# Altium PCB STVC_PCB.PcbDoc
Units mil, origin at the board's own origin, x right, y up, seen from the top; angles counter-clockwise.
Board outline 1400 x 2000 mil, 2 copper layers (Top Layer, Bottom Layer); 8 components, 7 nets, 110 pads, 0 vias.
Unrouted connection lines stored in the file: 14.
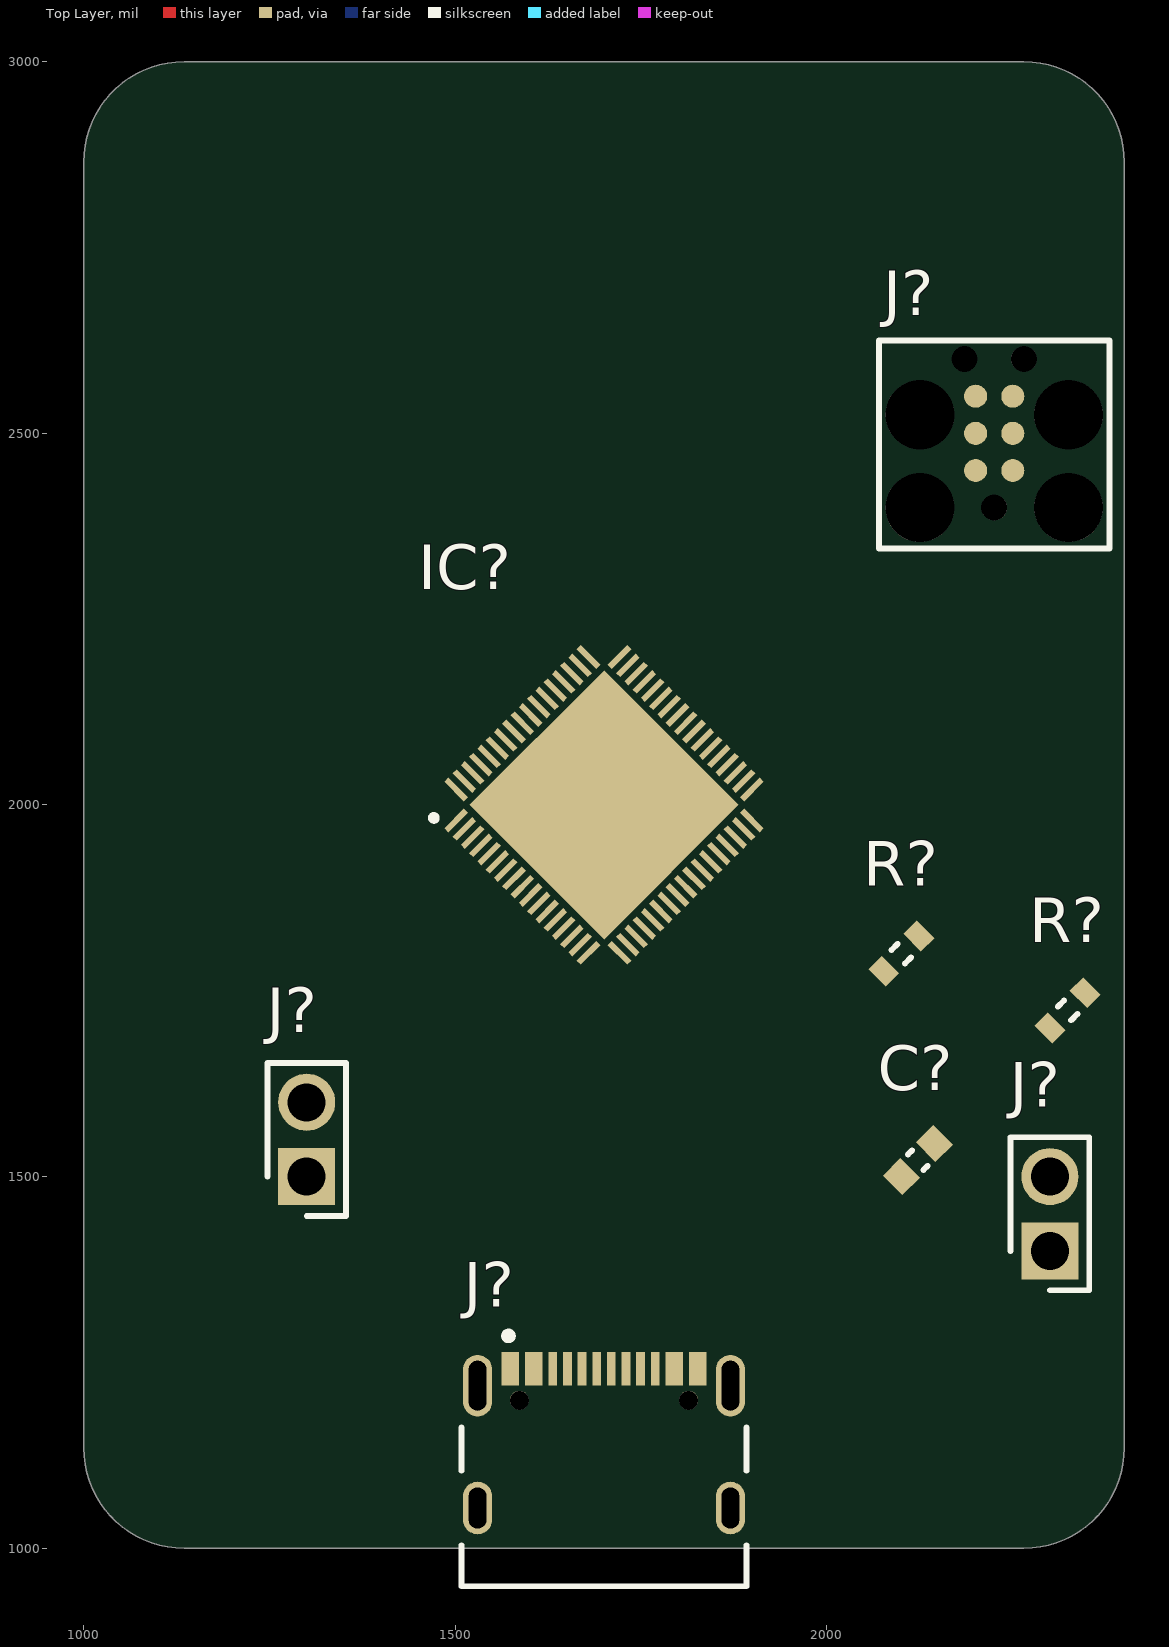
[diagram p0: Top Layer view]
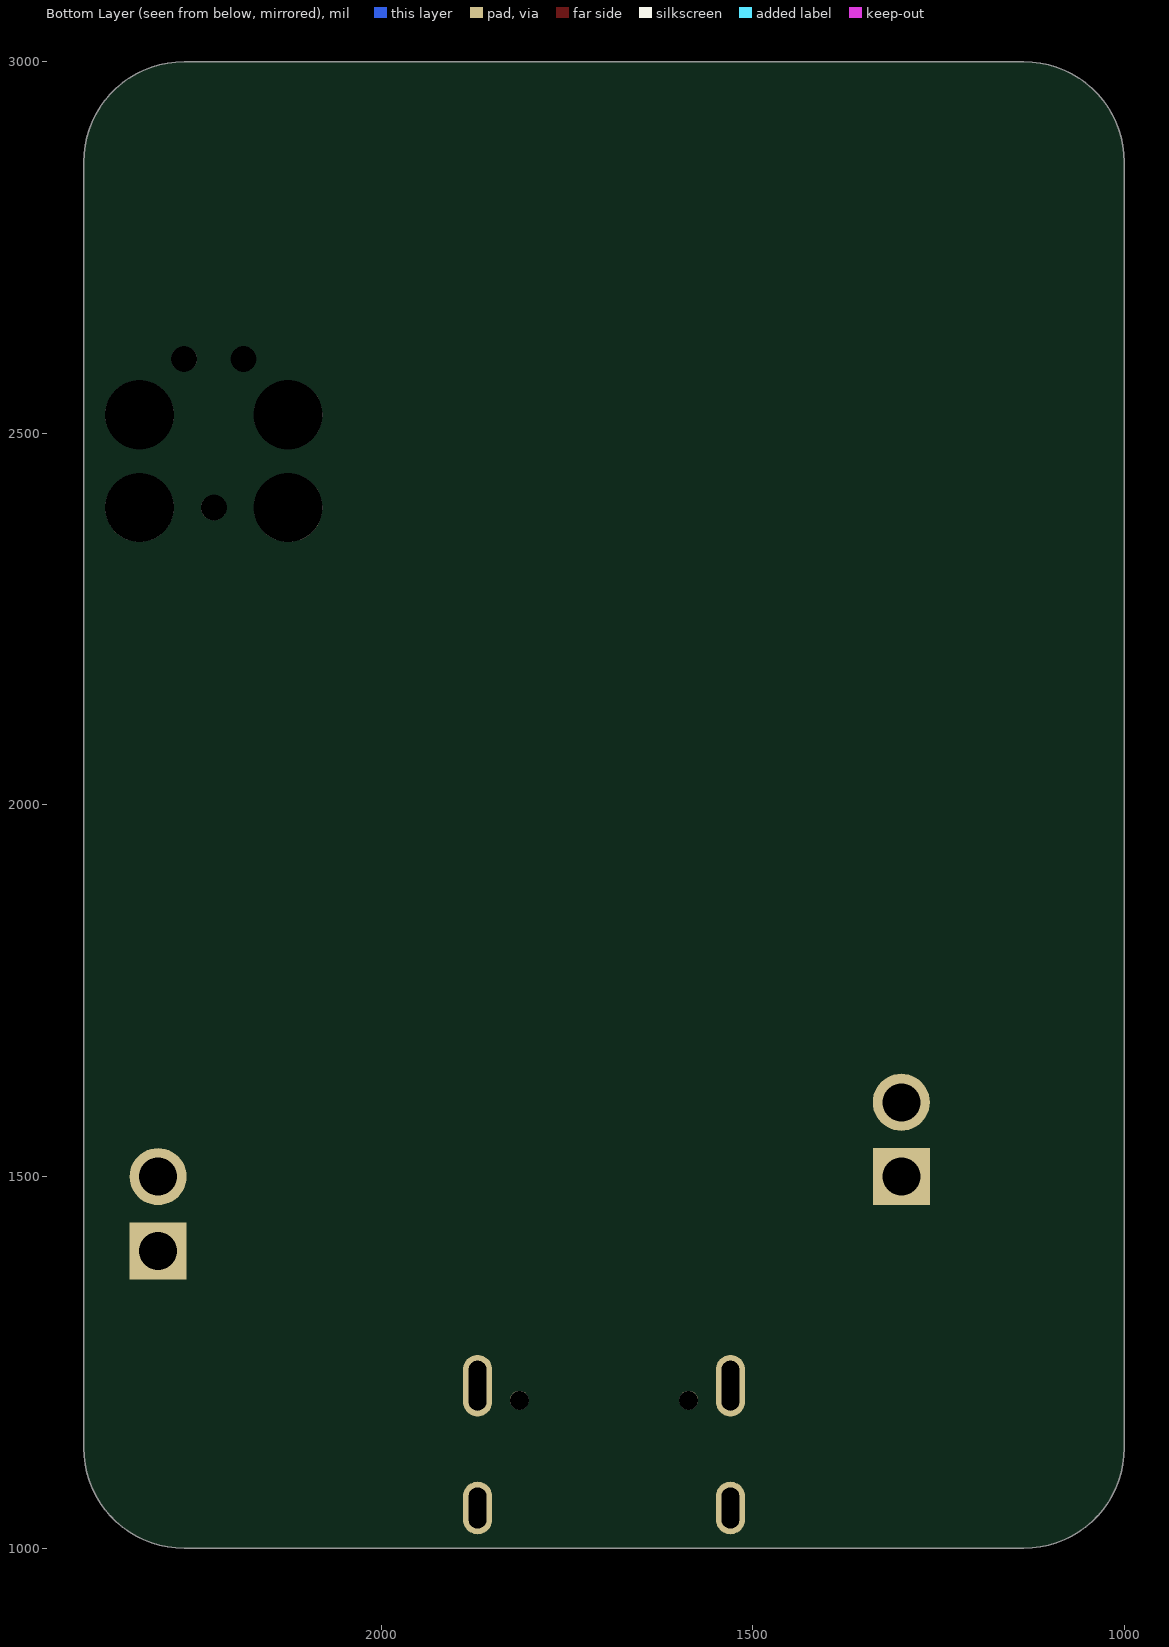
[diagram p1: Bottom Layer view, seen from below]

## Layer stack, top to bottom
Top Solder: solder mask 0.4, Solder Resist, Dk 3.5
Top Layer: signal copper 1.4
Dielectric 1: dielectric 12.6, FR-4, Dk 4.8
Bottom Layer: signal copper 1.4
Bottom Solder: solder mask 0.4, Solder Resist, Dk 3.5

## Board outline
1000,1135 1000,2865 cw(c1135,2865) 1135,3000 2265,3000 cw(c2265,2865) 2400,2865 2400,1135 cw(c2265,1135) 2265,1000 1135,1000 cw(c1135,1135)

## Design rules (kind name [scope] priority, off if disabled: settings)
Clearance [All] p1: gap=10 ignorepadtopadclearanceinfootprint=FALSE
PolygonConnect [All] p1: connectstyle=Relief reliefconductorwidth=10 reliefentries=4 polygonreliefangle="90 Angle" airgapwidth=10
RoutingVias [All] p1: holewidth=28 width=50 viastyle="Through Hole" minholewidth=28 minwidth=50 maxholewidth=28 maxwidth=50
SolderMaskExpansion [All] p1: expansion=4 istentingtop=FALSE
SupplyNets "Schematic Supply Nets_1" [InNet('VCC')] p1: voltage=0.000
SupplyNets "Schematic Supply Nets" [InNet('GND')] p2: voltage=0.000
Width [All] p1: maxlimit=10 minlimit=10 preferedwidth=10
30 further rules are at their usual default settings.

## Classes and differential pairs
component class Microcontroller: C? IC? J? R?

## Components (designator, comment, footprint, x,y, rotation, side; value= is the part's Value field where it differs from the comment)
C? "100 nF" CAP_0603 2122.27,1522.27 r45 top
IC? "STM32WBA65RIV6" QFN40P800X800X100-69N-D 1700,2000 r45 top
J? "USB-C" FP-USB4105-GF-A-MFG 1700,1100 r0 top
J? "HEADER-2P" HDRV2W110P0X254_1X2_508X254X854P 1300,1500 r90 top
J? "HEADER-2P" HDRV2W110P0X254_1X2_508X254X854P 2300,1400 r90 top
J? "Tag Connect" TC2030-MCP 2225,2400 r90 top
R? "10KΩ" RES_0603 2323.66,1723.66 r45 top
R? "10KΩ" RES_0603 2100,1800 r45 top

## Footprints (in the part's own frame and the unit in brackets; to place one, negate y for a bottom-side part, rotate by r counter-clockwise, add the part's x,y. Pads: shape width x height; smd on the part's side, far side on the other; paste and mask are expansions set on the pad)
CAP_0603 [mm] "0603 Generic Capacitor"
  rect 0.85x0.95 smd: 1(-0.8,0) 2(0.8,0)
  silkscreen extent -0.1,-0.38 0.1,0.38, body extent -0.8,-0.4 0.8,0.4, height 0.8
FP-USB4105-GF-A-MFG [mm]
  rrect100% 1x2.1 hole 1.7 slot 0.6 at 0 deg paste-2539.97 mask+0: 1(-4.32,3.015) 2(4.32,3.015)
  rrect100% 1x1.8 hole 1.4 slot 0.6 at 0 deg paste-2539.97 mask+0: 3(-4.32,-1.165) 4(4.32,-1.165)
  rect 0.6x1.15 smd paste+0 mask+0: A1-B12(-3.2,3.59) A4-B9(-2.4,3.59) B1-A12(3.2,3.59) B4-A9(2.4,3.59)
  rect 0.3x1.15 smd paste+0 mask+0: A5(-1.25,3.59) A6(-0.25,3.59) A7(0.25,3.59) A8(1.25,3.59) B5(1.75,3.59) B6(0.75,3.59) B7(-0.75,3.59) B8(-1.75,3.59)
  round 0.65 hole 0.65 unplated paste-2539.97 mask+0: ""(-2.89,2.515) ""(2.89,2.515)
  silkscreen extent -4.86,-3.84 4.86,4.84, body extent -4.96,-3.94 4.96,4.27, height 0.25
HDRV2W110P0X254_1X2_508X254X854P [mm]
  rect 1.95x1.95 hole 1.3: 1(0,0)
  round 1.95 hole 1.3: 2(2.54,0)
  silkscreen extent -1.35,-1.35 3.89,1.35, body extent -1.27,-1.27 3.81,1.27, height 8.54
QFN40P800X800X100-69N-D [mm]
  rect 0.95x0.2 smd: 1(-3.95,3.2) 2(-3.95,2.8) 3(-3.95,2.4) 4(-3.95,2) 5(-3.95,1.6) 6(-3.95,1.2) 7(-3.95,0.8) 8(-3.95,0.4) 9(-3.95,0) 10(-3.95,-0.4) 11(-3.95,-0.8) 12(-3.95,-1.2) 13(-3.95,-1.6) 14(-3.95,-2) 15(-3.95,-2.4) 16(-3.95,-2.8) 17(-3.95,-3.2) 35(3.95,-3.2) 36(3.95,-2.8) 37(3.95,-2.4) 38(3.95,-2) 39(3.95,-1.6) 40(3.95,-1.2) 41(3.95,-0.8) 42(3.95,-0.4) 43(3.95,0) 44(3.95,0.4) 45(3.95,0.8) 46(3.95,1.2) 47(3.95,1.6) 48(3.95,2) 49(3.95,2.4) 50(3.95,2.8) 51(3.95,3.2)
  rect 0.2x0.95 smd: 18(-3.2,-3.95) 19(-2.8,-3.95) 20(-2.4,-3.95) 21(-2,-3.95) 22(-1.6,-3.95) 23(-1.2,-3.95) 24(-0.8,-3.95) 25(-0.4,-3.95) 26(0,-3.95) 27(0.4,-3.95) 28(0.8,-3.95) 29(1.2,-3.95) 30(1.6,-3.95) 31(2,-3.95) 32(2.4,-3.95) 33(2.8,-3.95) 34(3.2,-3.95) 52(3.2,3.95) 53(2.8,3.95) 54(2.4,3.95) 55(2,3.95) 56(1.6,3.95) 57(1.2,3.95) 58(0.8,3.95) 59(0.4,3.95) 60(0,3.95) 61(-0.4,3.95) 62(-0.8,3.95) 63(-1.2,3.95) 64(-1.6,3.95) 65(-2,3.95) 66(-2.4,3.95) 67(-2.8,3.95) 68(-3.2,3.95)
  rect 6.5x6.5 smd: 69(0,0)
  silkscreen extent -4.52,3.7 -4.33,3.9, body extent -4.05,-4.05 4.05,4.05, height 1
RES_0603 [mm] "0603 Generic Resistor"
  rect 0.65x0.85 smd: 1(-0.85,0) 2(0.85,0)
  silkscreen extent -0.15,-0.33 0.15,0.33, body extent -0.8,-0.4 0.8,0.4, height 0.45
TC2030-MCP [mil]
  round 31 smd: 1(50,-25) 2(50,25) 3(100,-25) 4(100,25) 5(150,-25) 6(150,25)
  round 34 hole 35 unplated: A(0,0) B(200,40) C(200,-40)
  round 92 hole 93 unplated: D(0,-100) E(125,-100) F(0,100) G(125,100)
  silkscreen extent -55,-155 225,155

## Part data
C?: library part "100 nF Capacitor, 0603", "Multilayer Ceramic Capacitors MLCC - SMD/SMT KGM15BR71H104JT NEW GLOBAL PN 50V 0.1uF A 581-KGM15BR71H104JT", Manufacturer 1="KYOCERA AVX", Manufacturer Part Number 1=06035C104JAT2A, Package=0603, Supplier Part Number 1=581-06035C104JAT2A, Tolerance=5%, Voltage="50 V", Design Item ID="100 nF Capacitor, 0603", Library Ref=Capacitor_BASE, Supplier 1=Mouser
IC?: "Integrated Circuit", Manufacturer_Name=STMicroelectronics, Arrow Part Number=STM32WBA65RIV6, Arrow Price/Stock=https://www.arrow.com/en/products/stm32wba65riv6/stmicroelectronics?utm_currency=USD&region=nac, Datasheet Link=https://www.st.com/resource/en/datasheet/stm32wba62ci.pdf, Height=1mm, Manufacturer_Part_Number=STM32WBA65RIV6
J?: "USB4105-GF-A", Supplier Part Number 1=640-USB4105-GF-A, MPN=USB4105-GF-A, Supplier 1=Mouser
J? J?: "Connector / 61300211121", Manufacturer_Name="Wurth Elektronik", Manufacturer_Part_Number=61300211121, Mouser Part Number=710-61300211121, Datasheet Link=https://componentsearchengine.com/Datasheets/2/61300211121.pdf, Height=8.54mm, Mouser Price/Stock=https://www.mouser.co.uk/ProductDetail/Wurth-Elektronik/61300211121?qs=t4813l51qx%252B1A5GYDQxPlw%3D%3D, Supplier 1=Mouser, Supplier Part Number 1=710-61300211121
R? R?: library part "10 KOhm Resistor", "Thick Film Resistors - SMD General Purpose Chip Resistor 0603, 10kOhms, 1%, 1/10W", Manufacturer 1=YAGEO, Manufacturer Part Number 1=RC0603FR-0710KL, Package=0603, Power=0.1W, Supplier Part Number 1=603-RC0603FR-0710KL, Tolerance=0.01, Design Item ID="10 KOhm Resistor", Library Ref=Resistor_BASE, Supplier 1=Mouser

## Nets (pads, with @x,y where several pads share a name; then routed paths per layer and width w, separated by ;. In a path a pad name is that pad's centre, name@x,y a point inside that pad or via, vN(x,y) a via of type N, cw(c..) or ccw(c..) an arc to the next point about the centre after c; other vN are vias at no path point)
GND: C?.1 J?.1@1529.92,1218.7 J?.2@1300,1600 J?.2@1870.08,1218.7 J?.3@1529.92,1054.13 J?.4@1870.08,1054.13 J?.5 J?.A1-B12 J?.B1-A12 R?.1@2300,1700
NetC?_2: C?.2 J?.1@1300,1500 R?.1@2076.34,1776.34
NetJ?_2: J?.2@2300,1500 R?.2@2347.33,1747.33
NRST: J?.3@2250,2500
SWCLK: J?.4@2200,2500
SWDIO: J?.2@2200,2450
VCC: J?.1@2250,2450 J?.1@2300,1400 R?.2@2123.66,1823.66
pads on no net: IC?.1 IC?.2 IC?.3 IC?.4 IC?.5 IC?.6 IC?.7 IC?.8 IC?.9 IC?.10 IC?.11 IC?.12 IC?.13 IC?.14 IC?.15 IC?.16 IC?.17 IC?.18 IC?.19 IC?.20 IC?.21 IC?.22 IC?.23 IC?.24 IC?.25 IC?.26 IC?.27 IC?.28 IC?.29 IC?.30 IC?.31 IC?.32 IC?.33 IC?.34 IC?.35 IC?.36 IC?.37 IC?.38 IC?.39 IC?.40 IC?.41 IC?.42 IC?.43 IC?.44 IC?.45 IC?.46 IC?.47 IC?.48 IC?.49 IC?.50 IC?.51 IC?.52 IC?.53 IC?.54 IC?.55 IC?.56 IC?.57 IC?.58 IC?.59 IC?.60 IC?.61 IC?.62 IC?.63 IC?.64 IC?.65 IC?.66 IC?.67 IC?.68 IC?.69 J?. J?.6 J?.A J?.A4-B9 J?.A5 J?.A6 J?.A7 J?.A8 J?.B J?.B4-A9 J?.B5 J?.B6 J?.B7 J?.B8 J?.C J?.D J?.E J?.F J?.G

## Silkscreen, mask and mechanical layers (free items; w line width, h text height)
Mechanical 1:
  lines w10: 1000,1135 ccw(c1135,1135) 1135,1000 2265,1000 ccw(c2265,1135) 2400,1135 2400,2865 ccw(c2265,2865) 2265,3000 1135,3000 ccw(c1135,2865) 1000,2865 1000,2100 1000,1135